# EAGLE board FLODAR_V3 (EAGLE 9.6.2)
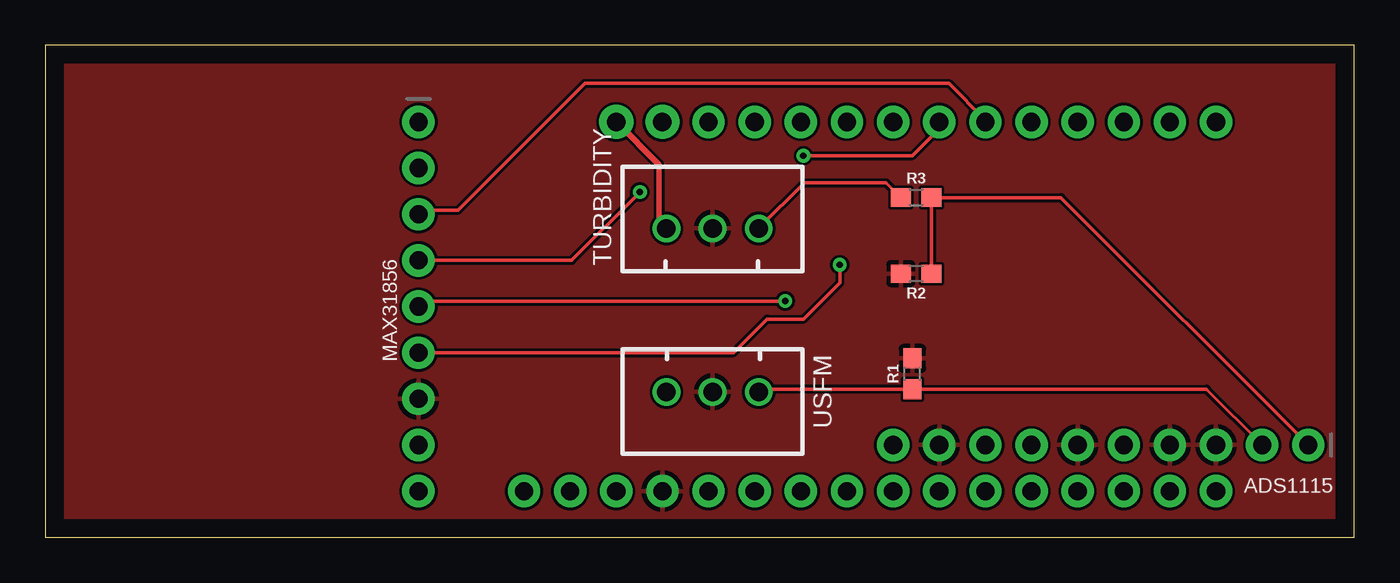
[diagram p0: board, top side]
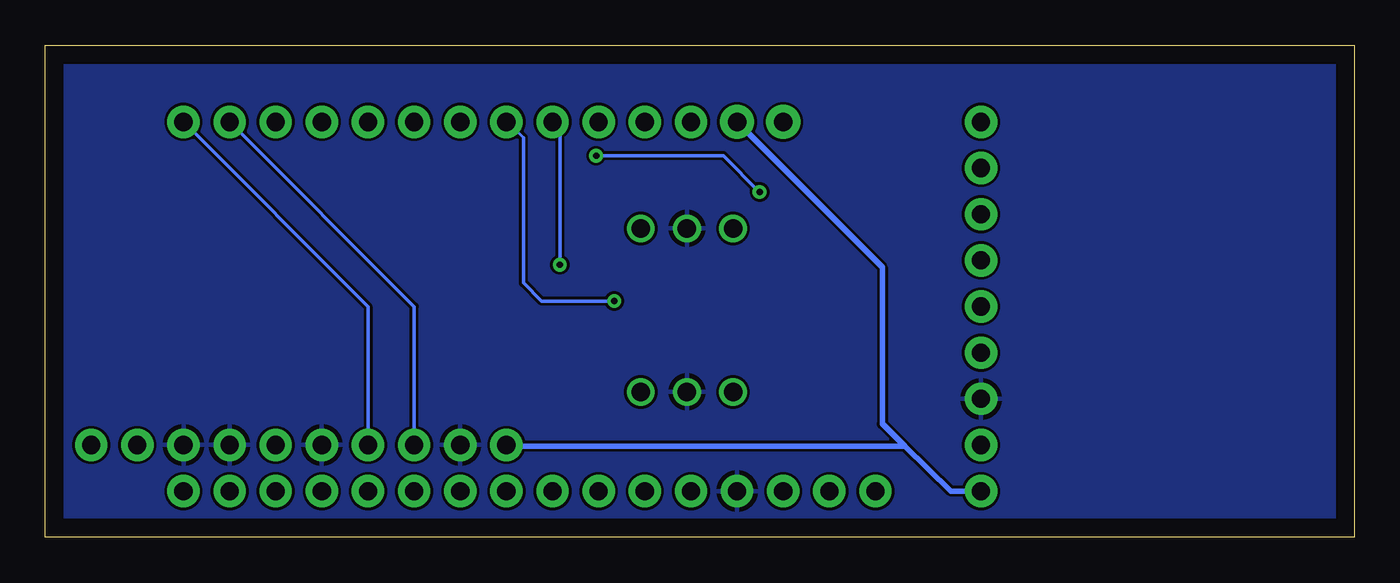
[diagram p1: board, bottom side, seen from below]

Size 72.05 x 27.07 mm. Coordinates in mm from the lower left corner, seen from the top.
Outline: 0,0 72.05,0 72.05,27.07 0,27.07 0,0
Copper layers (1*16): Top 0.035mm / dielectric 1.5mm / Bottom 0.035mm
Design rules "default": minimum track width 6mil, minimum drill 0.35mm, track to track 6mil, track to pad 6mil, pad to pad 6mil, via to via 6mil, smd to smd 6mil, copper to edge 40mil, drill to drill 6mil, minimum pad ring 10mil, minimum via ring 8mil, stop-mask expansion 4mil, vias tented up to drill 0mil, thermal gap 10mil
Net classes: 3 sig: width 0.152 mm, clearance 0.152 mm

## Footprints (pad centres in the part's own frame; a part is rotated, then mirrored left to right if it is on the bottom)
1X02_NO_SILK = drill 1.016 pad 1.88: 1 0,0; 2 2.54,0
1X10_ROUND70 = drill 1 pad 1.778: 1 -11.43,0; 2 -8.89,0; 3 -6.35,0; 4 -3.81,0; 5 -1.27,0; 6 1.27,0; 7 3.81,0; 8 6.35,0; 9 8.89,0; 10 11.43,0
1X09_ROUND_70 = drill 1 pad 1.778: 1 -10.16,0; 2 -7.62,0; 3 -5.08,0; 4 -2.54,0; 5 0,0; 6 2.54,0; 7 5.08,0; 8 7.62,0; 9 10.16,0
FEATHERWING = drill 1 pad 1.778: 1 6.35,1.27; 2 8.89,1.27; 3 11.43,1.27; 4 13.97,1.27; 5 16.51,1.27; 6 19.05,1.27; 7 21.59,1.27; 8 24.13,1.27; 9 26.67,1.27; 10 29.21,1.27; 11 31.75,1.27; 12 34.29,1.27; 13 36.83,1.27; 14 39.37,1.27; 15 41.91,1.27; 16 44.45,1.27; 17 44.45,21.59; 18 41.91,21.59; 19 39.37,21.59; 20 36.83,21.59; 21 34.29,21.59; 22 31.75,21.59; 23 29.21,21.59; 24 26.67,21.59; 25 24.13,21.59; 26 21.59,21.59; 27 19.05,21.59; 28 16.51,21.59
0603 = smd 1.1 x 1: 1 -0.85,0; 2 0.85,0
JST-XH-03-PACKAGE-ROUND-PAD = drill 1.016: 1 -2.54,0; 2 0,0; 3 2.54,0

## Placement (x,y rotation side)
3V|5V1  [1X02_NO_SILK]  33.97,22.86 180 top
ADS1115  [1X10_ROUND70]  58.1,5.08 180 top
MAX31856  [1X09_ROUND_70]  20.54,12.7 270 top
MS3  FEATHERWING  [FEATHERWING]  20,1.27 0 top
R1  150  [0603]  47.73,9 90 top
R2  2.2k  [0603]  47.94,14.51 180 top
R3  3.3k  [0603]  47.94,18.7 0 top
TURBIDITY  JST-XH-03-PIN-ROUND-PAD  [JST-XH-03-PACKAGE-ROUND-PAD]  36.73,17 0 top
USFM  JST-XH-03-PIN-ROUND-PAD  [JST-XH-03-PACKAGE-ROUND-PAD]  36.73,8 180 top

## Library data of the parts
3V|5V1 = SparkFun-Connectors
ADS1115 MAX31856 = microbuilder
MS3 = adafruit_wing
R1 = SparkFun-Resistors; PROD_ID: RES-11028
R2 = SparkFun-Resistors; PROD_ID: RES-08272
R3 = SparkFun-Resistors; PROD_ID: RES-07851
TURBIDITY USFM = Rembrandt Electronics - JST XH Connectors v1-0

## Nets
5VRAIL: 3V|5V1.2 TURBIDITY.1
!CS: MAX31856.3 MS3.22
!FAULT: MAX31856.2
AIN2: ADS1115.2 R1.1 USFM.1
AIN3: ADS1115.1 R2.1 R3.2
ALERT: ADS1115.5
DRDY: MAX31856.1
GND: ADS1115.3 ADS1115.4 ADS1115.6 ADS1115.9 MAX31856.7 MS3.4 R1.2 R2.2 TURBIDITY.2 USFM.2
SCK: MAX31856.6 MS3.25
SCL: ADS1115.8 MS3.18
SD0: MAX31856.5 MS3.24
SDA: ADS1115.7 MS3.17
SDI: MAX31856.4 MS3.23
SIGNAL: R3.1 TURBIDITY.3
VIN: 3V|5V1.1 ADS1115.10 MAX31856.9

## Tracks (layer width: path | path; a pad name or v marks a point on that pad's centre or on a via)
5VRAIL
  Top 0.305: 3V|5V1.2 33.78,20.51 33.78,17.41 TURBIDITY.1
!CS
  Top 0.152: MAX31856.3 20.76,18 | 51.75,22.96 MS3.22
  Top 0.2: 20.76,18 22.73,18 29.71,24.98 49.73,24.98 51.75,22.96
AIN2
  Top 0.152: 63.92,8.15 ADS1115.2 | 39.27,8.15 USFM.1
  Top 0.2: 63.92,8.15 R1.1 39.27,8.15
AIN3
  Top 0.2: ADS1115.1 55.91,18.7 R3.2 R2.1
GND
  pour Top: -1.27,28 -1.27,-1 73.73,-1 73.73,28
  pour Bottom: -1.27,28 73.73,28 73.73,-1 -1.27,-1
SCK  (via drill 0.35)
  Top 0.2: MAX31856.6 37.89,10.16 39.73,12 41.73,12 43.73,14 v43.73,15
  Bottom 0.152: 43.73,22.46 MS3.25
  Bottom 0.2: v43.73,15 43.73,22.46
SCL
  Bottom 0.2: ADS1115.8 51.75,12.7 MS3.18
SD0  (via drill 0.35)
  Top 0.152: MAX31856.5 20.84,13
  Top 0.2: 20.84,13 v40.73,13
  Bottom 0.152: 45.73,22 46.59,22.86 MS3.24
  Bottom 0.2: v40.73,13 44.73,13 45.73,14 45.73,22
SDA
  Bottom 0.2: MS3.17 54.29,12.7 ADS1115.7
SDI  (via drill 0.35)
  Top 0.152: 49.21,22.48 MS3.23
  Top 0.2: MAX31856.4 28.97,15.24 v32.73,19 | v41.73,21 47.73,21 49.21,22.48
  Bottom 0.2: v32.73,19 34.73,21 v41.73,21
SIGNAL
  Top 0.152: 46.28,19.51 R3.1
  Top 0.2: TURBIDITY.3 41.78,19.51 46.28,19.51
VIN
  Bottom 0.152: 46.59,5 ADS1115.10
  Bottom 0.305: 3V|5V1.1 25.97,14.86 25.97,6.24 24.73,5 | 24.73,5 46.59,5 | MAX31856.9 22.19,2.54 24.73,5

## Text on the board
bStop: Hypnos V2 | Hypnos V2